# Altium PCB Aidan_Macro_Pad.PcbDoc
Units mm, origin at the board's own origin, x right, y up, seen from the top; angles counter-clockwise.
Board outline 84 x 124 mm, 2 copper layers (Top Layer, Bottom Layer); 43 components, 36 nets, 184 pads, 24 vias.
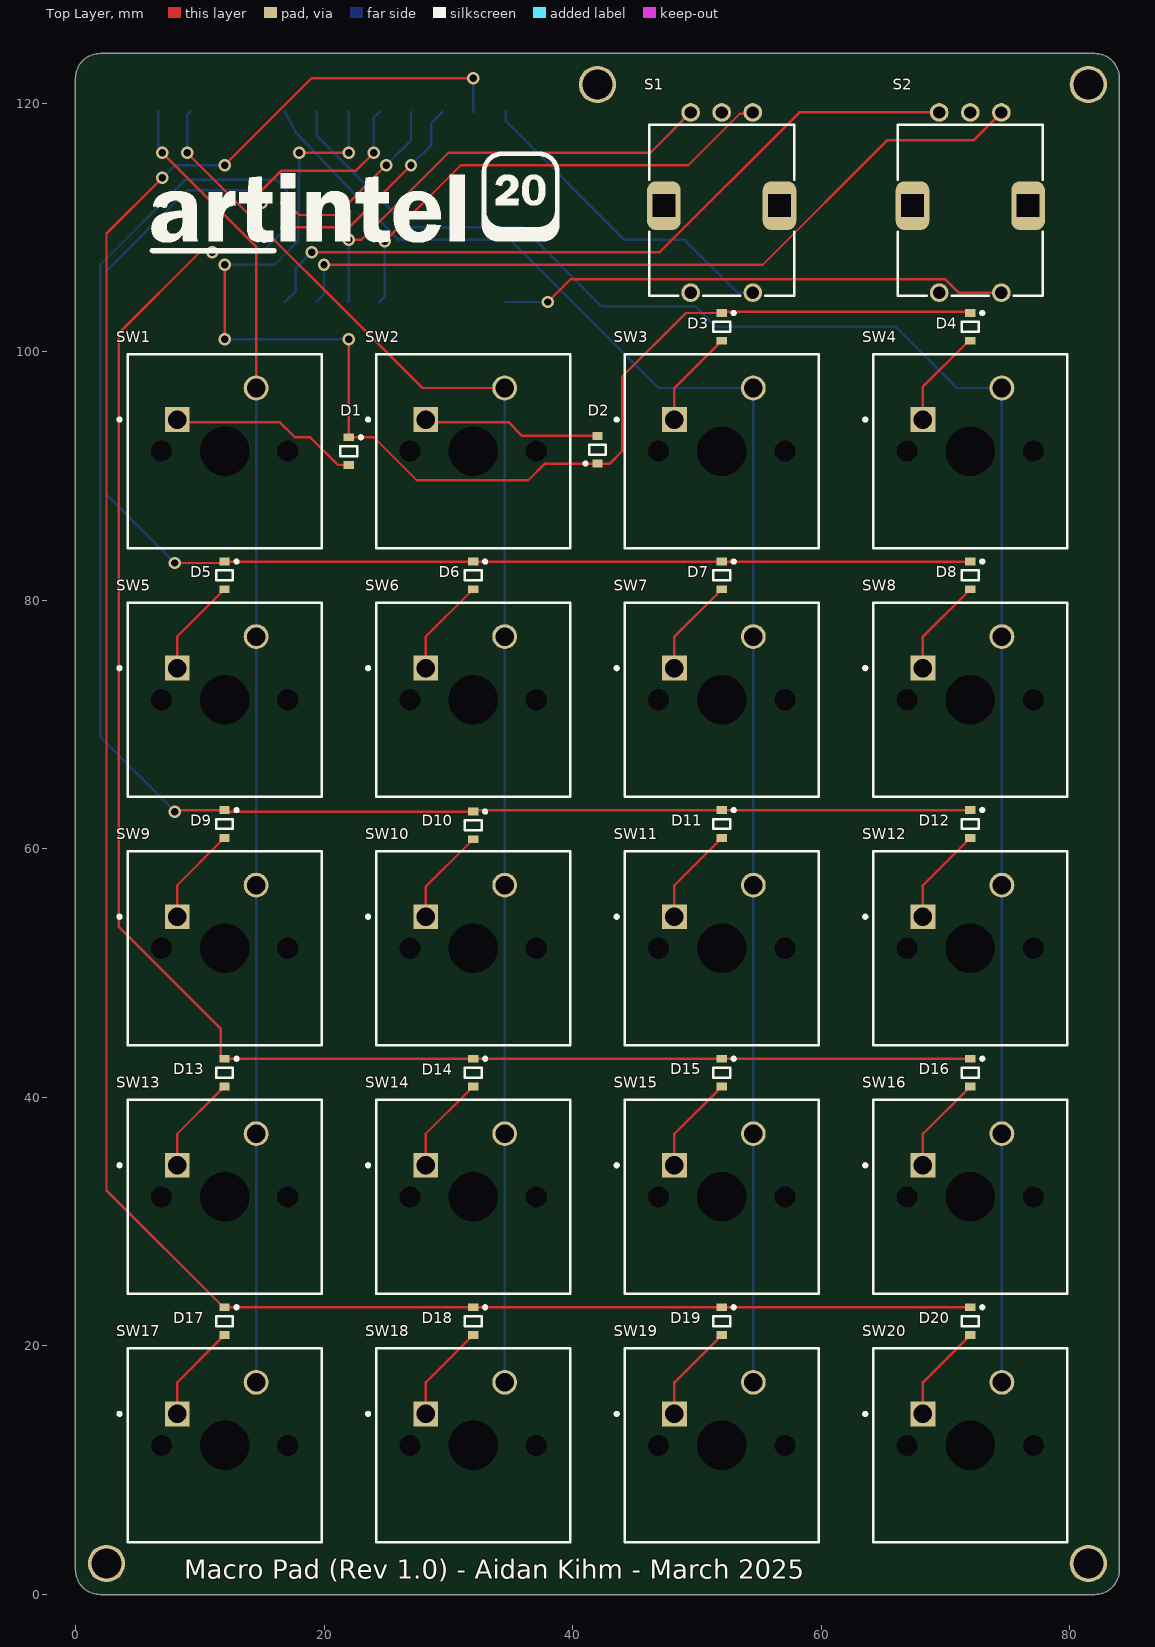
[diagram p0: Top Layer view]
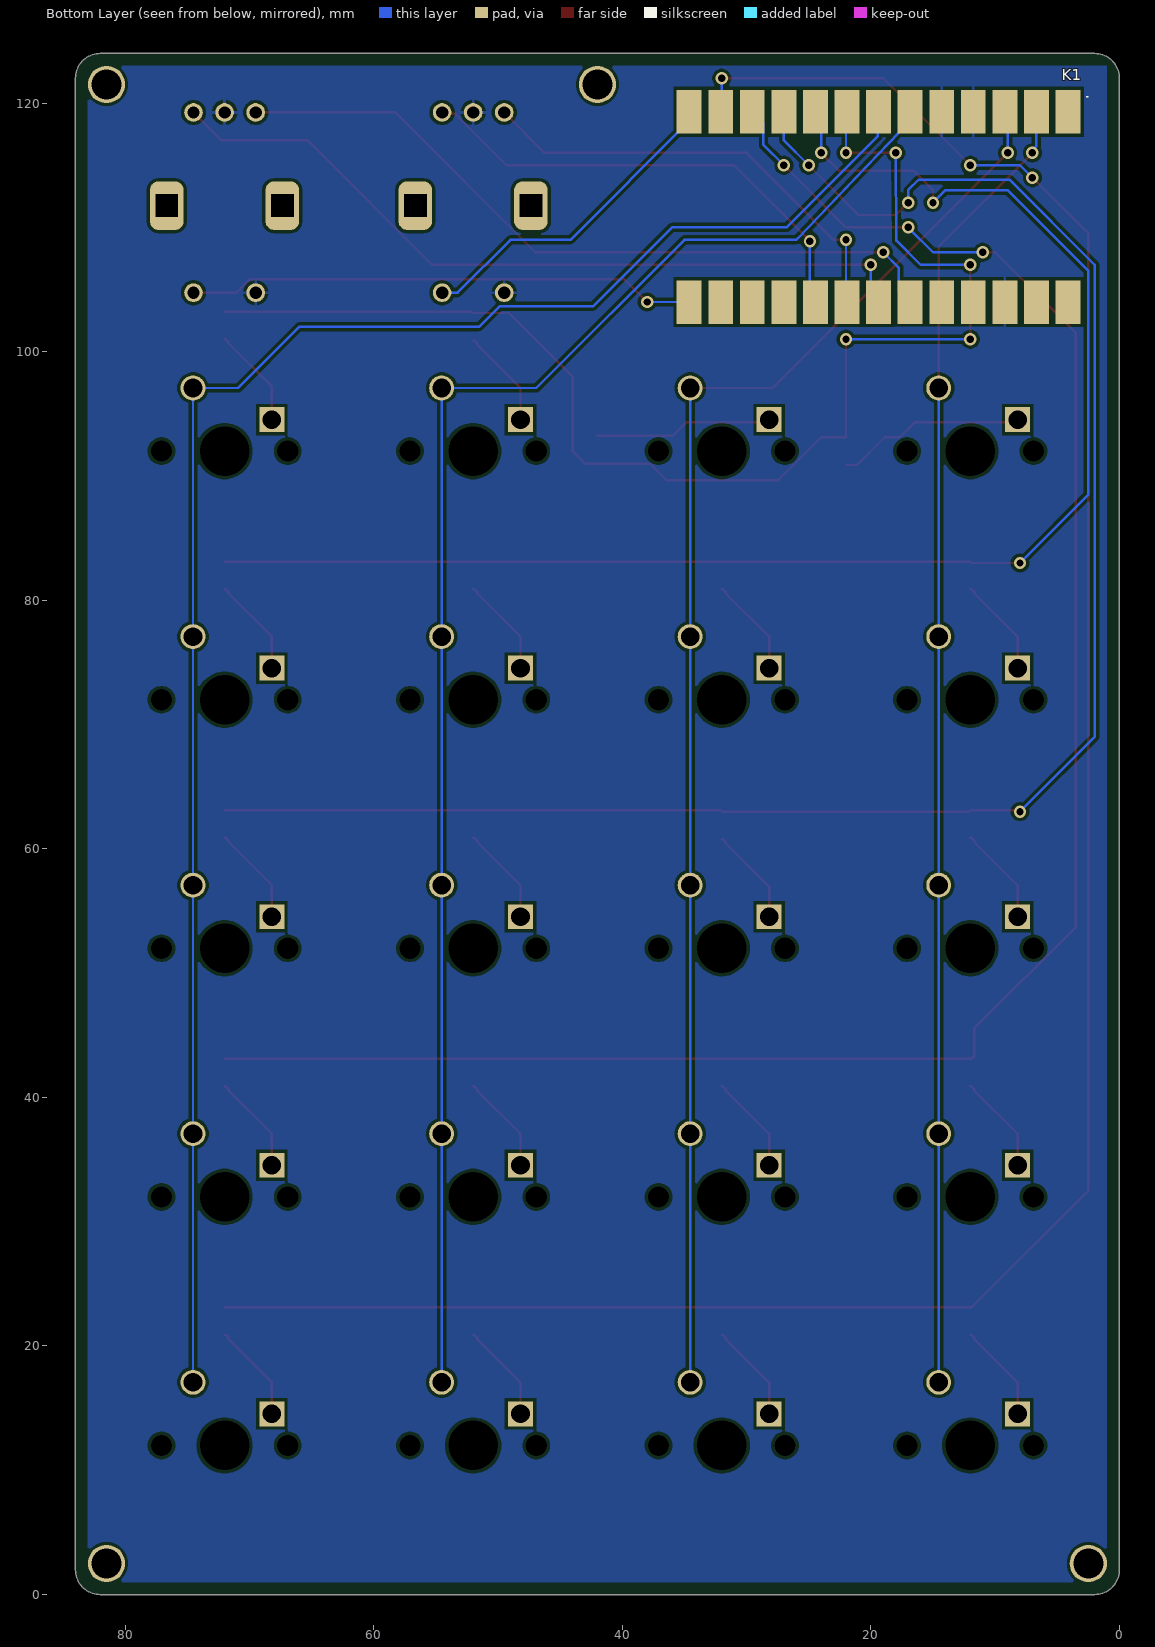
[diagram p1: Bottom Layer view, seen from below]

## Layer stack, top to bottom
Top Solder: solder mask 0.0102, Solder Resist, Dk 3.5
Top Layer: signal copper 0.0356
Dielectric 1: dielectric 0.32, FR-4, Dk 4.8
Bottom Layer: signal copper 0.0356
Bottom Solder: solder mask 0.0102, Solder Resist, Dk 3.5

## Board outline
0,2 0,122 cw(c2,122) 2,124 82,124 cw(c82,122) 84,122 84,2 cw(c82,2) 82,0 2,0 cw(c2,2)

## Design rules (kind name [scope] priority, off if disabled: settings)
AssemblyTestPointUsage [All] p1: isadvanced=TRUE
AssemblyTestpoint [All] p1: isadvanced=TRUE testpointundercomponent=TRUE minsize=1.016 maxsize=2.54 preferedsize=1.524 minholesize=0 maxholesize=1.016 preferedholesize=0.813 testpointgrid=0.025 usegrid=TRUE gridtolerance=0 allowsidetop=TRUE allowsidebottom=TRUE
Clearance Clearance_1 [OnMid vs OnMid] p1: gap=0.25 ignorepadtopadclearanceinfootprint=FALSE sourcerule=38 cellrowname=All cellrowtype=0 cellcolname=All cellcoltype=0 innerlayers=TRUE
Clearance Clearance_2 [(ExistsOnLayer('Top Layer') Or ExistsOnLayer('Bottom Layer')) vs (ExistsOnLayer('Top Layer') Or ExistsOnLayer('Bottom Layer'))] p2: gap=0.25 ignorepadtopadclearanceinfootprint=FALSE sourcerule=38 cellrowname=All cellrowtype=0 cellcolname=All cellcoltype=0 outerlayers=TRUE
Clearance [All] p3: gap=0.254 ignorepadtopadclearanceinfootprint=FALSE ismatrix=TRUE
ComponentClearance [All] p1: isadvanced=TRUE gap=0.254 collisioncheckmode=3 verticalgap=0.254 showdistances=FALSE
FabricationTestPointUsage [All] p1: isadvanced=TRUE valid=0 allowmultiple=FALSE
FabricationTestpoint [All] p1: isadvanced=TRUE side=3 testpointundercomponent=TRUE minsize=1.016 maxsize=2.54 preferedsize=1.524 minholesize=0 maxholesize=1.016 preferedholesize=0.813 testpointgrid=0.025 allowsidetop=TRUE allowsidebottom=TRUE usegrid=TRUE gridtolerance=0
FanoutControl Fanout_BGA [IsBGA] p1: isadvanced=TRUE bgadir=Out bgaviamode=Centered fanoutstyle=Auto fanoutdirection=Alternating viagrid=0.025 // Fanout_BGA (Default Rule)
FanoutControl Fanout_LCC [IsLCC] p2: isadvanced=TRUE bgadir=Out bgaviamode=Centered fanoutstyle=Auto fanoutdirection=Alternating viagrid=0.025 // Fanout_LCC (Default Rule)
FanoutControl Fanout_SOIC [IsSOIC] p3: isadvanced=TRUE bgadir=Out bgaviamode=Centered fanoutstyle=Auto fanoutdirection=Alternating viagrid=0.025 // Fanout_SOIC (Default Rule)
FanoutControl Fanout_Small [(CompPinCount < 5)] p4: isadvanced=TRUE bgadir=Out bgaviamode=Centered fanoutstyle=Auto fanoutdirection=OutThenIn viagrid=0.025 // Fanout_Small (Default Rule)
FanoutControl Fanout_Default [All] p5: isadvanced=TRUE bgadir=Out bgaviamode=Centered fanoutstyle=Auto fanoutdirection=Alternating viagrid=0.025 // Fanout_Default (Default Rule)
Height [All] p1: isadvanced=TRUE minheight=0 maxheight=30 prefheight=12.7
HoleSize [All] p1: isadvanced=TRUE absolutevalues=TRUE maxlimit=5 minlimit=0.025 maxpercent=80.000 minpercent=20.000
HoleToHoleClearance [All] p1: isadvanced=TRUE gap=0.254 allowstackedmicrovias=TRUE
LayerPairs [All] p1: isadvanced=TRUE enforce=TRUE
MinimumSolderMaskSliver [All] p1: isadvanced=TRUE minsoldermaskwidth=0.254
NetAntennae [All] p1: isadvanced=TRUE netantennaetolerance=0
PasteMaskExpansion [All] p1: isadvanced=TRUE expansion=0
PlaneClearance [All] p1: isadvanced=TRUE clearance=0.508
PlaneConnect [All] p1: isadvanced=TRUE planeconnectstyle=Relief reliefexpansion=0.508 reliefentries=4 reliefconductorwidth=0.254 reliefairgap=0.254
PolygonConnect [All] p1: connectstyle=Relief reliefconductorwidth=0.254 reliefentries=4 polygonreliefangle="90 Angle" airgapwidth=0.254
RoutingCorners [All] p1: isadvanced=TRUE cornerstyle=45-Degree minsetback=2.54 maxsetback=2.54
RoutingPriority [All] p1: isadvanced=TRUE routingpriority=0
RoutingVias [All] p1: holewidth=0.6 width=1 viastyle="Through Hole" minholewidth=0.6 minwidth=1 maxholewidth=0.6 maxwidth=1
ShortCircuit [All] p1: isadvanced=TRUE allowed=FALSE
SilkToSilkClearance [All] p1: isadvanced=TRUE silktosilkclearance=0.254
SilkToSolderMaskClearance [IsPad] p1: isadvanced=TRUE minsilkscreentomaskgap=0.1 clearancetoexposedcopper=TRUE
SolderMaskExpansion SolderMaskExpansion_Vias [IsVia] p1: isadvanced=TRUE expansion=0.102 istentingtop=TRUE useseparateexpansions=TRUE expansionbottom=0.102 istentingbottom=TRUE
SolderMaskExpansion [All] p2: isadvanced=TRUE expansion=0.102 istentingtop=FALSE
UnRoutedNet [All] p1: isadvanced=TRUE
UnpouredPolygon [All] p1: isadvanced=TRUE
Width "Schematic Width Constraint" [InNetClass('Power')] p1: maxlimit=0.5 minlimit=0.25 preferedwidth=0.5 minimp=50.000000 maximp=50.000000 favimp=50.000000
Width [All] p2: maxlimit=0.2 minlimit=0.2 preferedwidth=0.2 minimp=50.000000 maximp=50.000000 favimp=50.000000
4 further rules are at their usual default settings.

## Classes and differential pairs
net class Power: GND

## Components (designator, comment, footprint, x,y, rotation, side; value= is the part's Value field where it differs from the comment)
D1 "BAT54HT1G" ONSC-SOD-323-2-477-02_V 22,92 r270 top
D2 "BAT54HT1G" ONSC-SOD-323-2-477-02_V 42,92.115 r90 top
D3 "BAT54HT1G" ONSC-SOD-323-2-477-02_V 52,102 r270 top
D4 "BAT54HT1G" ONSC-SOD-323-2-477-02_V 72,102 r270 top
D5 "BAT54HT1G" ONSC-SOD-323-2-477-02_V 12,82 r270 top
D6 "BAT54HT1G" ONSC-SOD-323-2-477-02_V 32,82 r270 top
D7 "BAT54HT1G" ONSC-SOD-323-2-477-02_V 52,82 r270 top
D8 "BAT54HT1G" ONSC-SOD-323-2-477-02_V 72,82 r270 top
D9 "BAT54HT1G" ONSC-SOD-323-2-477-02_V 12,62 r270 top
D10 "BAT54HT1G" ONSC-SOD-323-2-477-02_V 32,61.885 r270 top
D11 "BAT54HT1G" ONSC-SOD-323-2-477-02_V 52,62 r270 top
D12 "BAT54HT1G" ONSC-SOD-323-2-477-02_V 72,62 r270 top
D13 "BAT54HT1G" ONSC-SOD-323-2-477-02_V 12,42 r270 top
D14 "BAT54HT1G" ONSC-SOD-323-2-477-02_V 32,42 r270 top
D15 "BAT54HT1G" ONSC-SOD-323-2-477-02_V 52,42 r270 top
D16 "BAT54HT1G" ONSC-SOD-323-2-477-02_V 72,42 r270 top
D17 "BAT54HT1G" ONSC-SOD-323-2-477-02_V 12,22 r270 top
D18 "BAT54HT1G" ONSC-SOD-323-2-477-02_V 32,22 r270 top
D19 "BAT54HT1G" ONSC-SOD-323-2-477-02_V 52,22 r270 top
D20 "BAT54HT1G" ONSC-SOD-323-2-477-02_V 72,22 r270 top
K1 "KB2040" "KB2040 Footprint" 19.38,111.65 r270 bottom
S1 "482020514001" 4820xx514001 52,112 r90 top
S2 "482020514001" 4820xx514001 72,112 r90 top
SW1 "MX1A-11NW" CHRY-MX1A-11NW_V 12,92 r0 top
SW2 "MX1A-11NW" CHRY-MX1A-11NW_V 32,92 r0 top
SW3 "MX1A-11NW" CHRY-MX1A-11NW_V 52,92 r0 top
SW4 "MX1A-11NW" CHRY-MX1A-11NW_V 72,92 r0 top
SW5 "MX1A-11NW" CHRY-MX1A-11NW_V 12,72 r0 top
SW6 "MX1A-11NW" CHRY-MX1A-11NW_V 32,72 r0 top
SW7 "MX1A-11NW" CHRY-MX1A-11NW_V 52,72 r0 top
SW8 "MX1A-11NW" CHRY-MX1A-11NW_V 72,72 r0 top
SW9 "MX1A-11NW" CHRY-MX1A-11NW_V 12,52 r0 top
SW10 "MX1A-11NW" CHRY-MX1A-11NW_V 32,52 r0 top
SW11 "MX1A-11NW" CHRY-MX1A-11NW_V 52,52 r0 top
SW12 "MX1A-11NW" CHRY-MX1A-11NW_V 72,52 r0 top
SW13 "MX1A-11NW" CHRY-MX1A-11NW_V 12,32 r0 top
SW14 "MX1A-11NW" CHRY-MX1A-11NW_V 32,32 r0 top
SW15 "MX1A-11NW" CHRY-MX1A-11NW_V 52,32 r0 top
SW16 "MX1A-11NW" CHRY-MX1A-11NW_V 72,32 r0 top
SW17 "MX1A-11NW" CHRY-MX1A-11NW_V 12,12 r0 top
SW18 "MX1A-11NW" CHRY-MX1A-11NW_V 32,12 r0 top
SW19 "MX1A-11NW" CHRY-MX1A-11NW_V 52,12 r0 top
SW20 "MX1A-11NW" CHRY-MX1A-11NW_V 72,12 r0 top

## Footprints (in the part's own frame and the unit in brackets; to place one, negate y for a bottom-side part, rotate by r counter-clockwise, add the part's x,y. Pads: shape width x height; smd on the part's side, far side on the other; paste and mask are expansions set on the pad)
4820xx514001 [mm] "20 pulse with 20 Detent, half  cut shaft with Bushing, THT vertical  Encoder, with switch Function"
  round 1.5 hole 1: 1(-7.25,-2.5) 2(-7.25,2.5) A(7.25,-2.5) B(7.25,2.5) C(7.25,0)
  rrect50% 3.9x2.7 hole 1.8 square: S1(-0.25,4.65) S2(-0.25,-4.65)
  silkscreen extent -7.5,-5.85 6.25,5.85, body extent -7.55,-5.85 7.35,5.85, height 26.65
CHRY-MX1A-11NW_V [mm] "THD, 2-Leads, Body 15.6x15.6mm"
  rect 2x2 hole 1.499 paste-2539.97: 1(-3.81,2.54)
  round 2 hole 1.499 paste-2539.97: 2(2.54,5.08)
  round 0 hole 3.988 unplated paste-2539.97: MH1(0,0)
  round 0 hole 1.702 unplated paste-2539.97: MH2(-5.08,0) MH3(5.08,0)
  silkscreen extent -8.57,-7.8 7.8,7.8, body extent -7.8,-7.8 7.8,7.8, height 15.2
"KB2040 Footprint" [mm] "5302, Concave, 26-Leads, Pitch 2.54mm,  Body 33.02x17.78mm"
  rect 3.5x2 smd: 3.3V(7.65,5.08) A0(7.65,-5.08) A1(7.65,-2.54) A2(7.65,0) A3(7.65,2.54) D0(-7.65,12.7) D1(-7.65,10.16) D2(-7.65,2.54) D3(-7.65,0) D4(-7.65,-2.54) D5(-7.65,-5.08) D6(-7.65,-7.62) D7(-7.65,-10.16) D8(-7.65,-12.7) D9(-7.65,-15.24) D10(7.65,-15.24) D+(-7.65,15.24) D-(7.65,15.24) GND0(-7.65,7.62) GND1(-7.65,5.08) GND2(7.65,10.16) MISO(7.65,-10.16) MOSI(7.65,-12.7) RAW(7.65,12.7) RESET(7.65,7.62) SCK(7.65,-7.62)
  silkscreen extent -8.91,16.73 -8.81,16.83, body extent -8.89,-16.51 8.89,16.51, height 1.6
ONSC-SOD-323-2-477-02_V [mm] "SOD, 2-Leads, Body 1.7x1.25mm"
  rect 0.63x0.83 smd: 1(-1.115,0) 2(1.115,0)
  silkscreen extent -1.24,-0.67 0.4,1.09, body extent -0.85,-0.63 0.85,0.63, height 1.06

## Part data
D1 D2 D3 D4 D5 D6 D7 D8 D9 D10 D11 D12 D13 D14 D15 D16 D17 D18 D19 D20: library part CMP-004-00031-1, "Rectifier Diode, 1 Phase, 1 Element, 0.2A, 30V V(RRM), Silicon", Forward Voltage=240mV, Max Operating Temperature=150°C, Max Output current=200mA, Max Power Dissipation=200mW, Min Operating Temperature=-55°C, Non-rep Pk Forward Current-Max=600mA, Package Body Material=Plastic, Package Shape=Rectangular, Package Style="SMALL OUTLINEMeter", Rep Pk Reverse Voltage-Max=30V, Diode Element Material=SILICON, Diode Type=RECTIFIER, JESD-30 Code=R-PDSO-G2, JESD-609 Code=e3, Moisture Sensitivity Level=1, Number of Elements=1, Pins=2, Qualification Status="Not Qualified", Reach SVHC Compliant=Yes, Reverse Recovery Time-Max=0.005us, RoHS Compliant=Yes, Surface Mount=Yes, Terminal Finish=Tin, Terminal Form="Gull Wing", Terminal Position=DUAL
K1: library part CMP-00024-00006-3, "Keyboard driver"
S1 S2: library part CMP-00030-00001-2, "Rotary Position Encoder", RoHS Compliant=Yes
SW1 SW2 SW3 SW4 SW5 SW6 SW7 SW8 SW9 SW10 SW11 SW12 SW13 SW14 SW15 SW16 SW17 SW18 SW19 SW20: library part CMP-011-00013-1, "Keypad Switch, 1 Switches, SPST, Momentary, 0.01A, 12VDC, 0.78N, Solder Terminal, Through Hole-straight", Contact Current(DC)-Max=10mA, Contact DC Max Rating R Load=.01A@12VDC, Contact Voltage(DC)-Max=12V, Manufacturer Series=MX, Max Operating Temperature=70°C, Min Operating Temperature=-10°C, Operating Force-Max=0.78N, Body Breadth=15.6mm, Body Height=11.6mm, Body Length or Diameter=15.6mm, Circuit Configuration=1X1, Contact Bounce Time-Max=5ms, Mounting Technology="Through Hole", Number of Switches=1, Reach SVHC Compliant=Yes, RoHS Compliant=Yes, Switch Action=MOMENTARY, Switch Function=SPST, Switch Type=Keypad, Termination=Solder

## Free pads (board coordinates)
  round 3 hole 2.4: 1(2.5,2.5) 1(42,121.5) 1(81.5,2.5) 1(81.5,121.5)

## Via types
v1: diameter 1, hole 0.6, Top Layer to Bottom Layer, tented both sides, 24 vias

## Nets (pads, with @x,y where several pads share a name; then routed paths per layer and width w, separated by ;. In a path a pad name is that pad's centre, name@x,y a point inside that pad or via, vN(x,y) a via of type N, cw(c..) or ccw(c..) an arc to the next point about the centre after c; other vN are vias at no path point)
COL1: K1.D0 SW1.2 SW5.2 SW9.2 SW13.2 SW17.2 | length 105.5
  Top Layer w0.2: v1(7,116) 14.54,108.46 SW1.2
  Bottom Layer w0.2: K1.D0 6.68,116.536 7,116.216 v1(7,116) ; SW17.2 SW13.2 SW9.2 SW5.2 SW1.2
COL2: K1.D1 SW2.2 SW6.2 SW10.2 SW14.2 SW18.2 | length 116.8
  Top Layer w0.2: v1(9,116) 27.92,97.08 SW2.2
  Bottom Layer w0.2: v1(9,116) 9,119.08 K1.D1 ; SW18.2 SW14.2 SW10.2 SW6.2 SW2.2
COL3: K1.D2 SW3.2 SW7.2 SW11.2 SW15.2 SW19.2 | length 127.3
  Bottom Layer w0.2: K1.D2 17.74,117.65 25.883,109.117 26,109 26.083,109 35,109 46.92,97.08 SW3.2 SW7.2 SW11.2 SW15.2 SW19.2
COL4: K1.D3 SW4.2 SW8.2 SW12.2 SW16.2 SW20.2 | length 145.5
  Bottom Layer w0.2: K1.D3 19.431,119.249 19.431,117.367 26.798,110 36,110 42.35,103.65 49.879,103.65 51.529,102 66,102 70.92,97.08 SW4.2 SW8.2 SW12.2 SW16.2 SW20.2
EN1A: K1.A0 S1.A | length 39
  Top Layer w0.2: v1(24.899,108.899) 31,115 49.306,115 53.45,119.144 54.394,119.144 S1.A
  Bottom Layer w0.2: K1.A0 24.899,104.439 v1(24.899,108.899)
EN1B: K1.A1 S1.B | length 36.8
  Top Layer w0.2: v1(22,109) 23,109 30,116 46.25,116 S1.B
  Bottom Layer w0.2: K1.A1 22,104.08 v1(22,109)
EN2A: K1.A2 S2.A | length 62.8
  Top Layer w0.2: v1(20,107) 55.3,107 65.3,117 72.25,117 S2.A
  Bottom Layer w0.2: K1.A2 20,104.62 v1(20,107)
EN2B: K1.A3 S2.B | length 60.1
  Top Layer w0.2: v1(19,108) 47,108 58.25,119.25 S2.B
  Bottom Layer w0.2: K1.A3 17.74,104.9 17.74,106.74 v1(19,108)
GND: K1.GND0 K1.GND1 K1.GND2 S1.2 S1.C S2.2 S2.C
NetD1_2: D1.2 SW1.1 | length 15.3
  Top Layer w0.2: SW1.1 8.386,94.344 16.434,94.344 17.663,93.115 18.885,93.115 21.115,90.885 D1.2
NetD2_2: D2.2 SW2.1 | length 14.4
  Top Layer w0.2: SW2.1 28.386,94.344 34.831,94.344 35.944,93.23 D2.2
NetD3_2: D3.2 SW3.1 | length 8
  Top Layer w0.2: SW3.1 48.19,97.075 51.685,100.57 51.685,100.67 51.9,100.885 D3.2
NetD4_2: D4.2 SW4.1 | length 8.1
  Top Layer w0.2: SW4.1 68.19,97.19 71.685,100.685 71.685,100.785 71.9,101 D4.2@72,101
NetD5_2: D5.2 SW5.1 | length 8
  Top Layer w0.2: SW5.1 8.19,77.075 11.685,80.57 11.685,80.67 11.9,80.885 D5.2
NetD6_2: D6.2 SW6.1 | length 8
  Top Layer w0.2: SW6.1 28.19,77.075 31.685,80.57 31.685,80.67 31.9,80.885 D6.2
NetD7_2: D7.2 SW7.1 | length 8
  Top Layer w0.2: SW7.1 48.19,77.075 51.685,80.57 51.685,80.67 51.9,80.885 D7.2
NetD8_2: D8.2 SW8.1 | length 8
  Top Layer w0.2: SW8.1 68.19,77.075 71.685,80.57 71.685,80.67 71.9,80.885 D8.2
NetD9_2: D9.2 SW9.1 | length 8
  Top Layer w0.2: SW9.1 8.19,57.075 11.685,60.57 11.685,60.67 11.9,60.885 D9.2
NetD10_2: D10.2 SW10.1 | length 7.9
  Top Layer w0.2: SW10.1 28.19,56.96 31.685,60.455 31.685,60.555 31.9,60.77 D10.2
NetD11_2: D11.2 SW11.1 | length 8
  Top Layer w0.2: SW11.1 48.19,57.075 51.685,60.57 51.685,60.67 51.9,60.885 D11.2
NetD12_2: D12.2 SW12.1 | length 8
  Top Layer w0.2: SW12.1 68.19,57.075 71.685,60.57 71.685,60.67 71.9,60.885 D12.2
NetD13_2: D13.2 SW13.1 | length 8
  Top Layer w0.2: SW13.1 8.19,37.075 11.685,40.57 11.685,40.67 11.9,40.885 D13.2
NetD14_2: D14.2 SW14.1 | length 8
  Top Layer w0.2: SW14.1 28.19,37.075 31.685,40.57 31.685,40.67 31.9,40.885 D14.2
NetD15_2: D15.2 SW15.1 | length 8
  Top Layer w0.2: SW15.1 48.19,37.075 51.685,40.57 51.685,40.67 51.9,40.885 D15.2
NetD16_2: D16.2 SW16.1 | length 8
  Top Layer w0.2: SW16.1 68.19,37.075 71.685,40.57 71.685,40.67 71.9,40.885 D16.2
NetD17_2: D17.2 SW17.1 | length 8
  Top Layer w0.2: SW17.1 8.19,17.075 11.685,20.57 11.685,20.67 11.9,20.885 D17.2
NetD18_2: D18.2 SW18.1 | length 8
  Top Layer w0.2: SW18.1 28.19,17.075 31.685,20.57 31.685,20.67 31.9,20.885 D18.2
NetD19_2: D19.2 SW19.1 | length 8
  Top Layer w0.2: SW19.1 48.19,17.075 51.685,20.57 51.685,20.67 51.9,20.885 D19.2
NetD20_2: D20.2 SW20.1 | length 8
  Top Layer w0.2: SW20.1 68.19,17.075 71.685,20.57 71.685,20.67 71.9,20.885 D20.2
ROW1: D1.1 D2.1 D3.1 D4.1 K1.D4 | length 105.6
  Top Layer w0.2: v1(12,101) v1(12,107) ; v1(18,116) v1(22,116) ; v1(22,101) D1.1 24,93.115 27.459,89.656 36.434,89.656 37.778,91 D2.1 43,91 44,92 44,98 49.115,103.115 D3.1 52.115,103.23 D4.1@72,103.23
  Bottom Layer w0.2: v1(12,101) v1(22,101) ; v1(12,107) 16,107 17.941,108.941 v1(18,116) ; K1.D4 22,119.22 v1(22,116)
ROW2: D5.1 D6.1 D7.1 D8.1 K1.D5 | length 120.2
  Top Layer w0.2: v1(8,83) 11.885,83 D5.1 D6.1 D7.1 D8.1 ; v1(15,112) 15,113 16.577,114.577 22.577,114.577 v1(24,116)
  Bottom Layer w0.2: v1(8,83) 2.5,88.5 2.5,106.5 9,113 14,113 v1(15,112) ; v1(24,116) 24,118.84 K1.D5
ROW3: D9.1 D10.1 D11.1 D12.1 K1.D6 | length 145
  Top Layer w0.2: v1(8,63) 8.115,63.115 D9.1 12.115,63 D10.1 32.115,63.115 D11.1 D12.1 ; v1(17,112) 18,111 21,111 v1(25,115)
  Bottom Layer w0.2: v1(8,63) 2,69 2,107 8.85,113.85 16.15,113.85 17,113 v1(17,112) ; v1(25,115) 27,117 K1.D6
ROW4: D13.1 D14.1 D15.1 D16.1 K1.D7 | length 156.4
  Top Layer w0.2: v1(11,108) 10,108 3.5,101.5 3.5,53.722 11.685,45.537 11.685,43.33 11.9,43.115 D13.1 D14.1 D15.1 D16.1 ; v1(17,110) 22,110 v1(27,115)
  Bottom Layer w0.2: v1(11,108) 15,108 v1(17,110) ; v1(27,115) 28.64,116.64 28.64,118.4 K1.D7
ROW5: D17.1 D18.1 D19.1 D20.1 K1.D8 | length 187.8
  Top Layer w0.2: v1(7,114) 2.5,109.5 2.5,32.515 11.9,23.115 D18.1 D19.1 D20.1 ; v1(12,115) 19,122 v1(32,122)
  Bottom Layer w0.2: v1(7,114) 8,115 v1(12,115) ; v1(32,122) 32,119.38 K1.D8
SW1: K1.D9 S1.1 | length 26.3
  Bottom Layer w0.2: K1.D9 34.62,118.55 44.17,109 49,109 53.25,104.75 S1.1
SW2: K1.D10 S2.1 | length 41.1
  Top Layer w0.2: v1(38,104) 39.85,105.85 69.956,105.85 71.056,104.75 S2.1
  Bottom Layer w0.2: K1.D10 v1(38,104)
pads on no net: K1.3.3V K1.D+ K1.D- K1.MISO K1.MOSI K1.RAW K1.RESET K1.SCK S1.S1 S1.S2 S2.S1 S2.S2 SW1.MH1 SW1.MH2 SW1.MH3 SW2.MH1 SW2.MH2 SW2.MH3 SW3.MH1 SW3.MH2 SW3.MH3 SW4.MH1 SW4.MH2 SW4.MH3 SW5.MH1 SW5.MH2 SW5.MH3 SW6.MH1 SW6.MH2 SW6.MH3 SW7.MH1 SW7.MH2 SW7.MH3 SW8.MH1 SW8.MH2 SW8.MH3 SW9.MH1 SW9.MH2 SW9.MH3 SW10.MH1 SW10.MH2 SW10.MH3 SW11.MH1 SW11.MH2 SW11.MH3 SW12.MH1 SW12.MH2 SW12.MH3 SW13.MH1 SW13.MH2 SW13.MH3 SW14.MH1 SW14.MH2 SW14.MH3 SW15.MH1 SW15.MH2 SW15.MH3 SW16.MH1 SW16.MH2 SW16.MH3 SW17.MH1 SW17.MH2 SW17.MH3 SW18.MH1 SW18.MH2 SW18.MH3 SW19.MH1 SW19.MH2 SW19.MH3 SW20.MH1 SW20.MH2 SW20.MH3

## Polygon pours and split planes (outlines as drawn)
GND on Bottom Layer "Ground Plane" (solid, remove dead copper, pour order 0): 83,123 83,1 1,1 1,123

## Silkscreen, mask and mechanical layers (free items; w line width, h text height)
Top Overlay:
  drawing of 13 lines, arcs and shapes, not listed
  text "Macro Pad (Rev 1.0) - Aidan Kihm - March 2025" at 8.754,1.254 h1.52
Mechanical 1:
  the board outline again, w0.254